# Altium PCB DIOT_SYS_extender_card.PcbDoc (part 1 of 6)
Units mm, origin at the board's own origin, x right, y up, seen from the top; angles counter-clockwise.
Board outline 280.04 x 100 mm, 6 copper layers (Top Layer, L2GND, L3, L4, L5GND, Bottom Layer), stack 1.558 mm thick; 18 components, 344 nets, 1062 pads, 179 vias.
Unrouted connection lines stored in the file: 389.
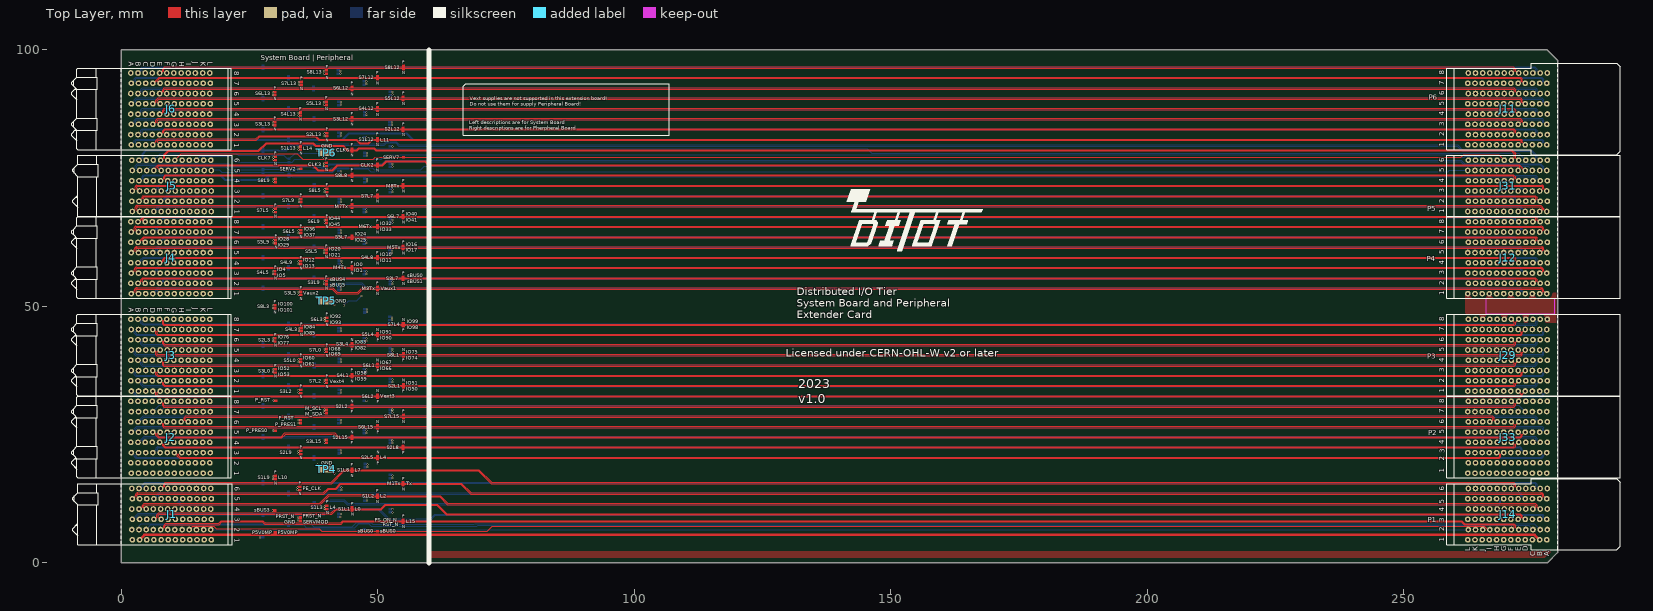
[diagram p0: Top Layer view]
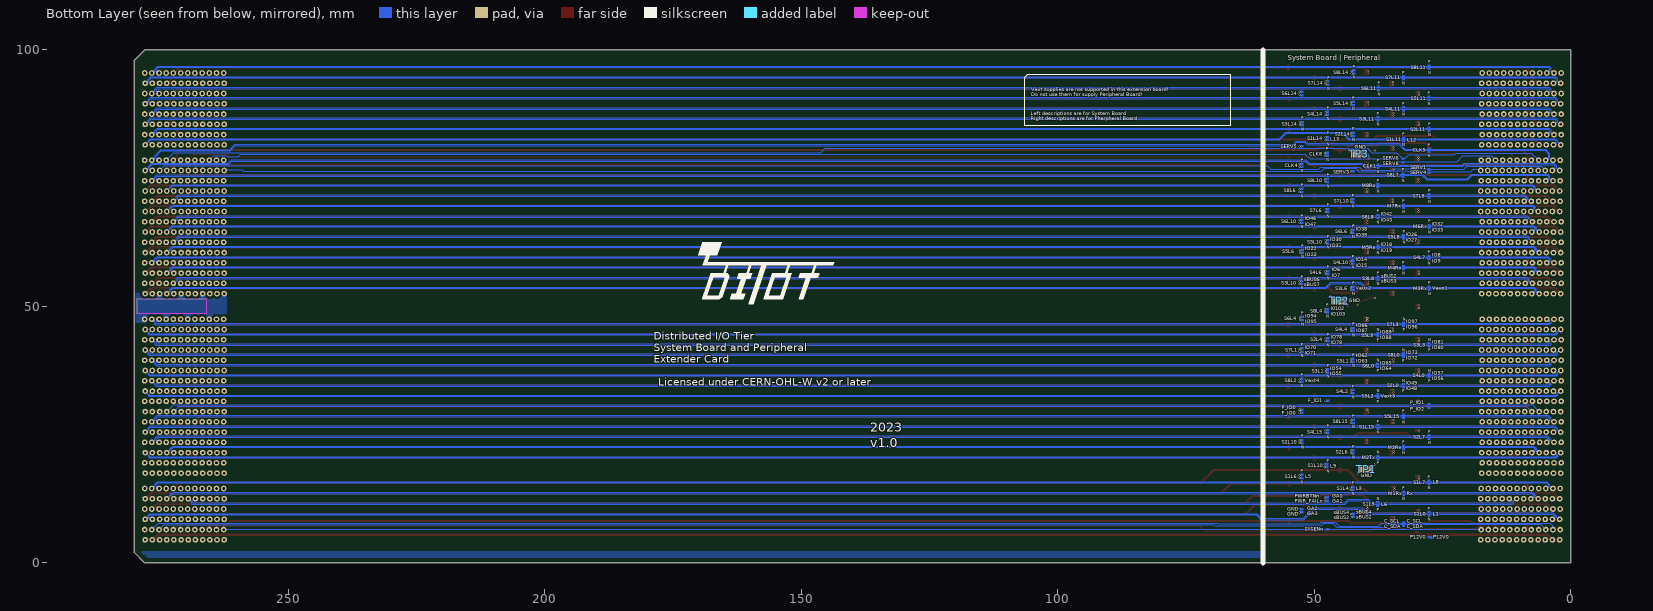
[diagram p1: Bottom Layer view, seen from below]
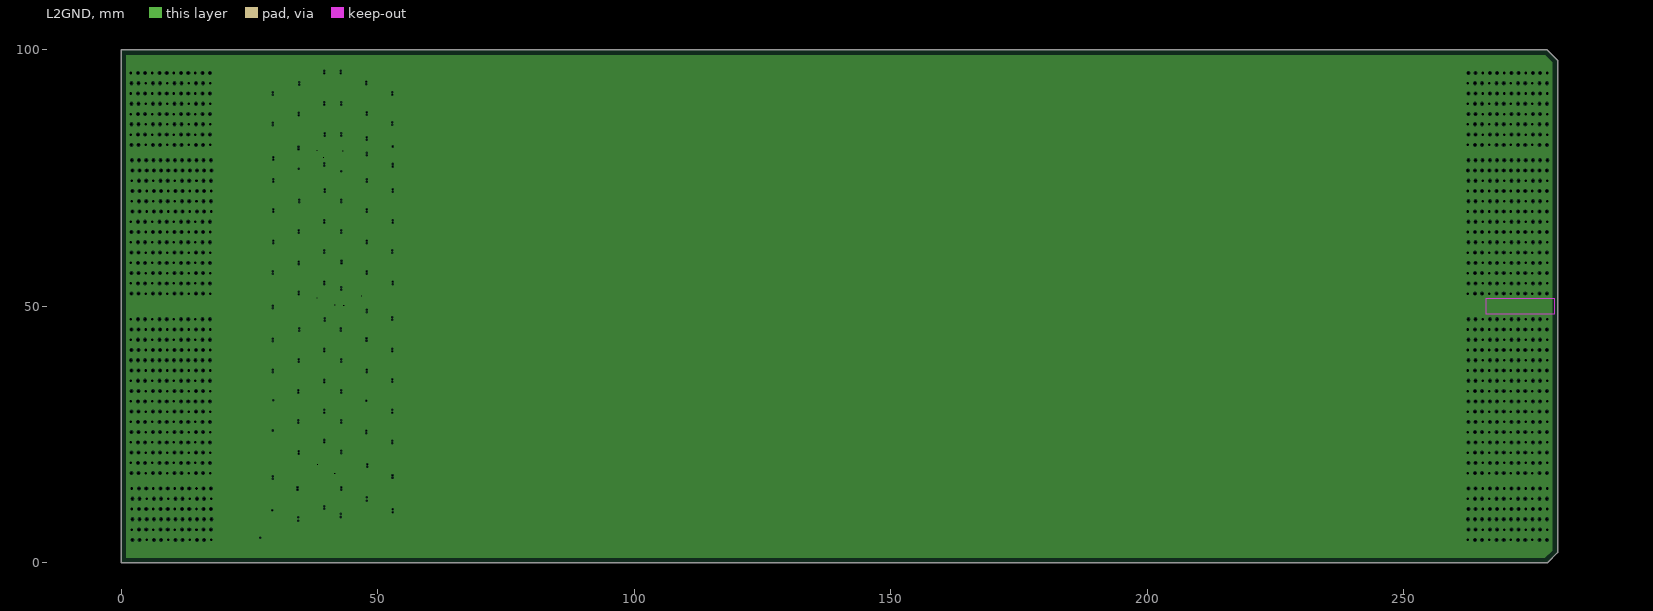
[diagram p2: L2GND, clearances drawn from the general rule]
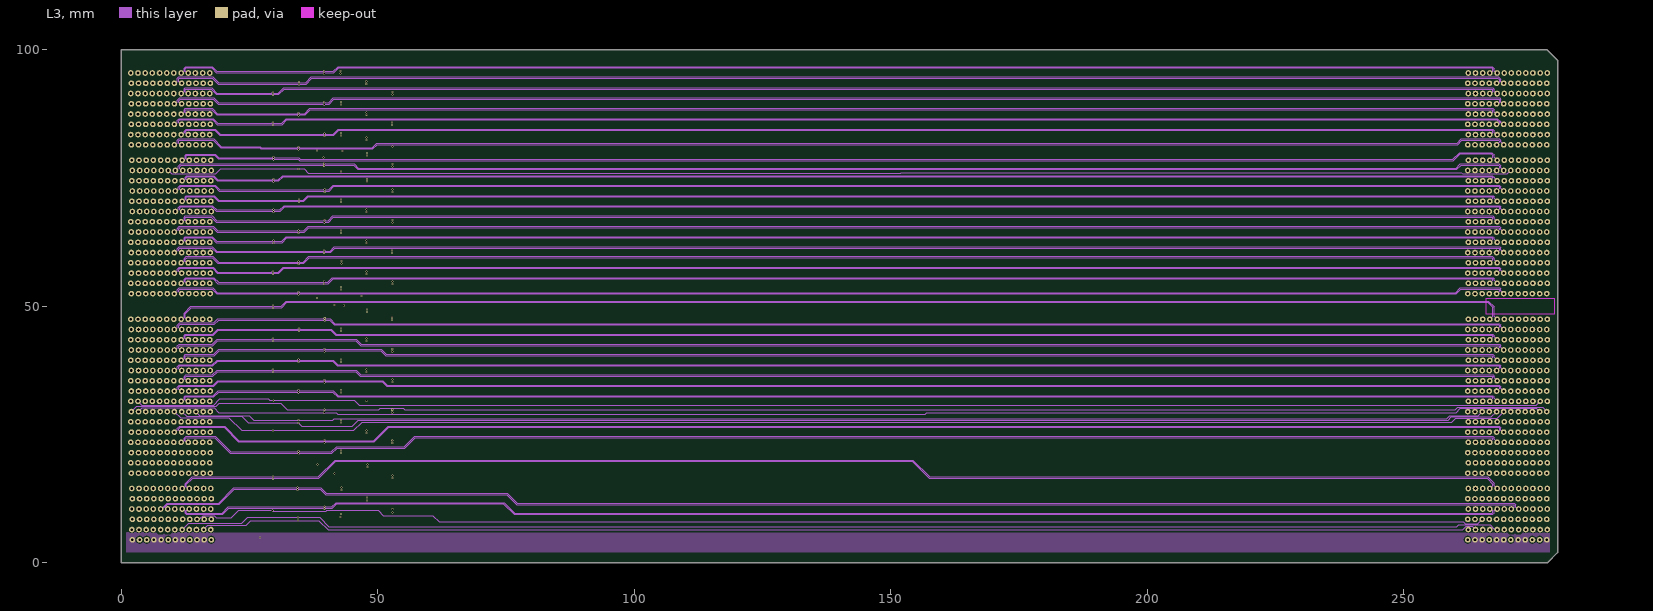
[diagram p3: L3]
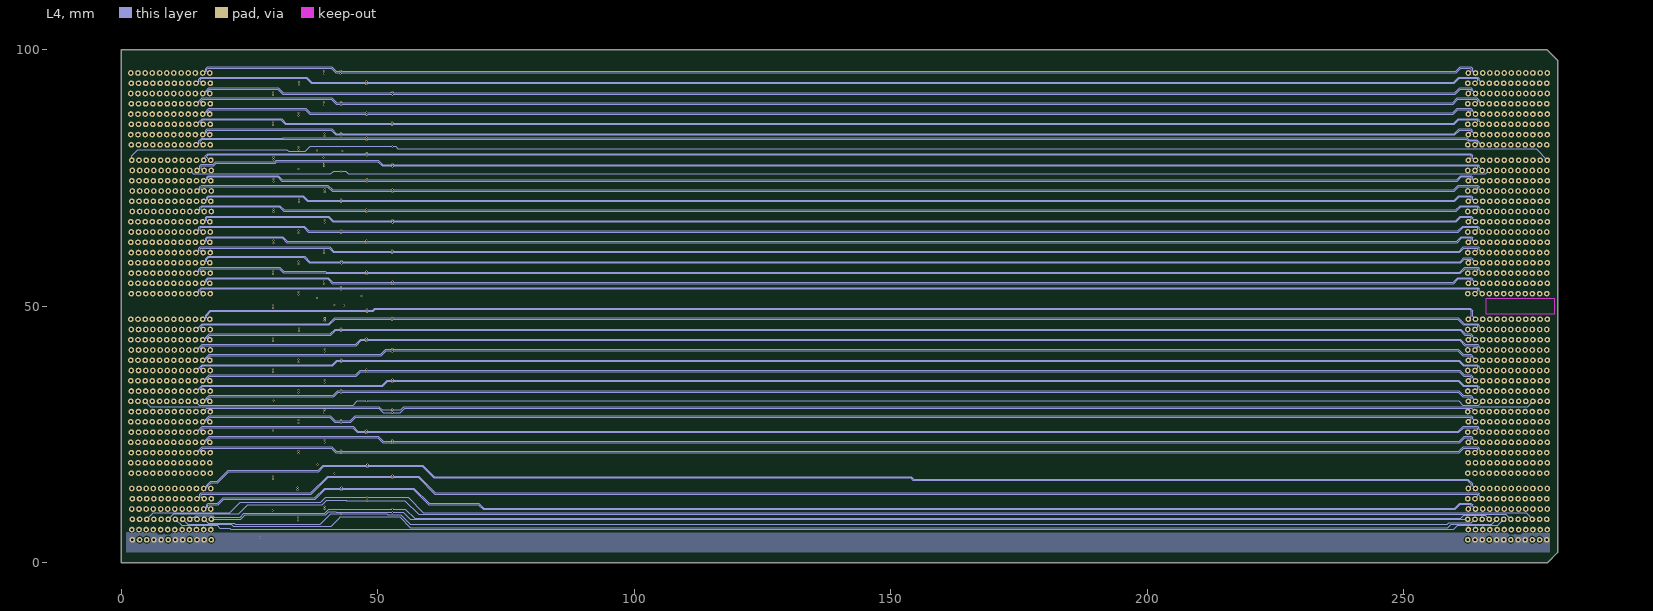
[diagram p4: L4]
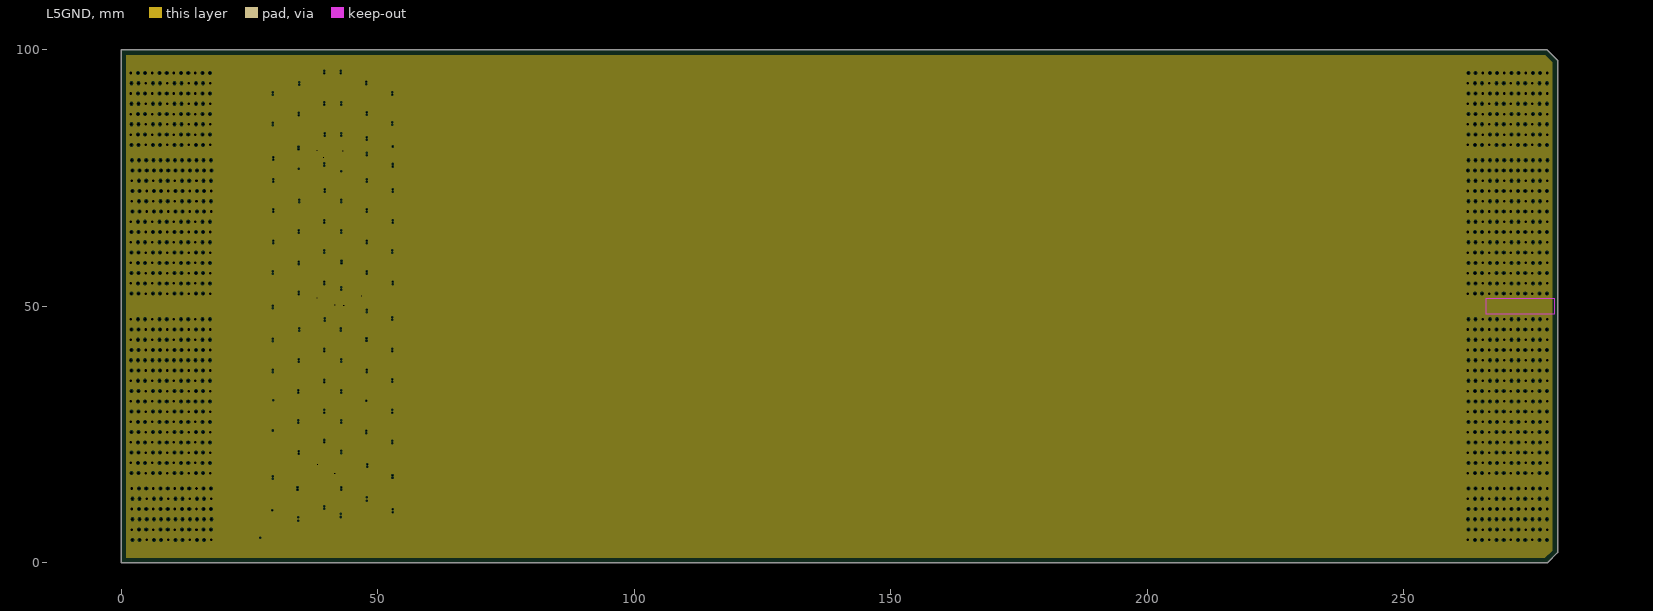
[diagram p5: L5GND, clearances drawn from the general rule]
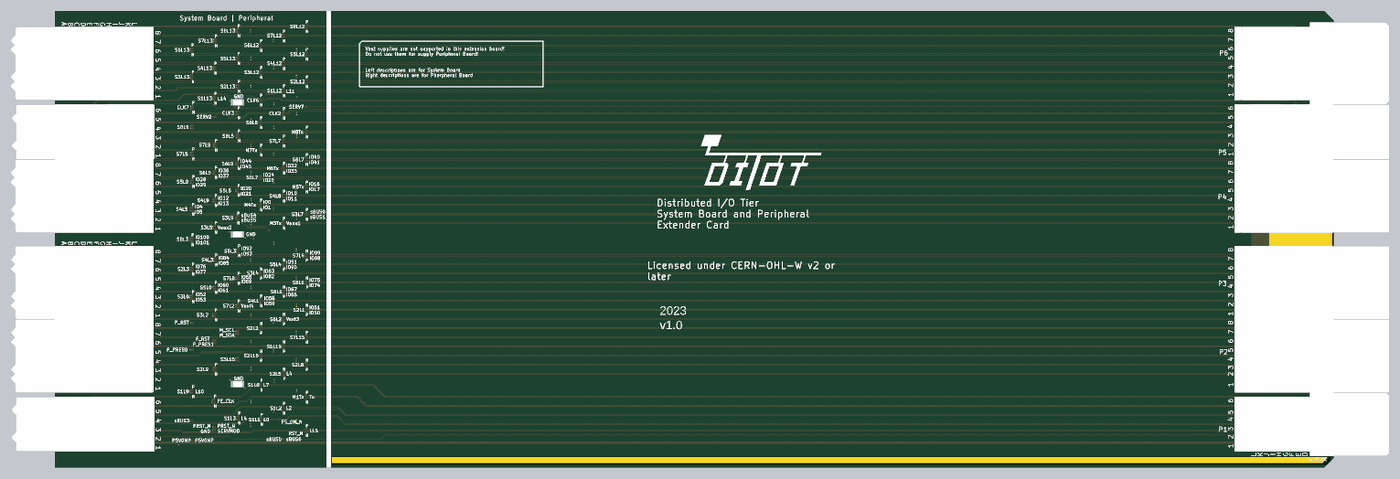
[diagram p11: 3D render of the assembled board from above, using the file's embedded part models]

## Layer stack, top to bottom
Top Solder: solder mask 0.013, Solder Resist, Dk 3.5
Top Layer: signal copper 0.035
Dielectric1: prepreg 0.11, FR-4, Dk 4.3
L2GND: plane copper 0.017, net GND
Dielectric 2: core 0.15, FR-4, Dk 4.3
L3: signal copper 0.017
Dielectric 6: core 0.9, FR-4, Dk 4.3
L4: signal copper 0.017
Dielectric 10: core 0.15, FR-4, Dk 4.3
L5GND: plane copper 0.017, net GND
Dielectric 11: prepreg 0.11, FR-4, Dk 4.3
Bottom Layer: signal copper 0.035
Bottom Solder: solder mask 0.013, Solder Resist, Dk 3.5

## Board outline
0,0 0,100 278.039,100 280.039,98 280.039,2 278.039,0

## Design rules (kind name [scope] priority, off if disabled: settings)
Clearance Clearance_poly_diff [IsRegion vs InDifferentialPairClass('All Differential Pairs')] p1: gap=0.5 ignorepadtopadclearanceinfootprint=FALSE
Clearance Clearance_Poly [InPoly and not InNet('P12V0')  and not InNet('P1V8_AUX')] p2: gap=0.254 ignorepadtopadclearanceinfootprint=FALSE
Clearance [All vs not HasFootprint('Net Tie')] p3: gap=0.08 ignorepadtopadclearanceinfootprint=FALSE except(0.2: Arc-Poly Track-Poly SMDPad-Poly THPad-Poly Via-Poly Fill-Poly Poly-Poly)
ComponentClearance ComponentClearance_pressfit [HasCompParameterValue('PressFit','Yes') vs InComponent('No Component')] p1: gap=5 collisioncheckmode=3 verticalgap=0.254 showdistances=FALSE
ComponentClearance ComponentClearance_NM [InComponentClass('NotMounted')] p2: gap=0 collisioncheckmode=3 verticalgap=0 showdistances=FALSE
ComponentClearance Overlapping [InComponent('M3') or InComponent('M4') or InComponent('LD1') or InComponent('LD5') or InComponent('LD9') or InComponent('Cage1') or InComponent('HS2') or InComponent('J5')   or InComponent('IC44') or InComponent('IC21') or InComponent('IC43') or InComponent('IC19')] p3: gap=0 collisioncheckmode=3 verticalgap=0 showdistances=TRUE
ComponentClearance ComponentClearance_Top [not InComponentClass('Overlapping') and InComponentClass('Top Side Components') vs InComponentClass('Top Side Components')] p4: gap=0 collisioncheckmode=3 verticalgap=2540 showdistances=FALSE
ComponentClearance [All] p5: gap=0.254 collisioncheckmode=3 verticalgap=0.254 showdistances=FALSE
DiffPairsRouting DiffPairsRouting_D100 [InAnyDifferentialPair] p1: maxlimit=0.16 minlimit=0.13 mostfreqgap=0.16 toplayer_maxgap=0.13 toplayer_prefgap=0.13 toplayer_minwidth=0.11 toplayer_maxwidth=0.11 toplayer_prefwidth=0.11 midlayer1_mingap=0.16 midlayer1_minwidth=0.085 midlayer1_maxwidth=0.085 midlayer1_prefwidth=0.085 midlayer4_mingap=0.16 midlayer4_minwidth=0.085 midlayer4_maxwidth=0.085 midlayer4_prefwidth=0.085 bottomlayer_maxgap=0.13 bottomlayer_prefgap=0.13 bottomlayer_minwidth=0.11 bottomlayer_maxwidth=0.11 bottomlayer_prefwidth=0.11 impedanceprofiledriven=TRUE impedanceprofileid={96ED8E2F-C5F9-42CC-A5B5-1531FE6239C8} impedanceprofilevalue=100.000000 maxuncoupledlength=25
FabricationTestPointUsage TestPointUsage [All] p1: valid=0 allowmultiple=FALSE
FabricationTestpoint Testpoint [All] p1: side=3 testpointundercomponent=TRUE minsize=1.016 maxsize=2.54 preferedsize=1.524 minholesize=0 maxholesize=1.016 preferedholesize=0.813 testpointgrid=0.025 allowsidetop=TRUE allowsidebottom=TRUE usegrid=TRUE gridtolerance=0
Height Height_Bot [OnBottom and not (InComponent('FTG2') or InComponent('FTG3')or InComponent('NT6'))] p1: minheight=0 maxheight=2 prefheight=1
Height Height_Top [OnTop] p2: minheight=0 maxheight=25 prefheight=10
HoleSize [All] p1: absolutevalues=TRUE maxlimit=5 minlimit=0.2 maxpercent=80.000 minpercent=20.000
HoleToHoleClearance [All] p1: gap=0.2 allowstackedmicrovias=TRUE
MinimumAnnularRing MinimumAnnularRing_Via [IsVia] p1: minimumring=0.1
MinimumAnnularRing [All] p2: minimumring=0.198
MinimumSolderMaskSliver [IsThruPin vs IsThruPin] p1: minsoldermaskwidth=0
PermittedLayers [All] p1: toplayerpermitted=TRUE bottomlayerpermitted=FALSE
PlaneClearance PlaneClearance_MGT [InNet('*MGT*')] p1: clearance=0.254
PlaneClearance [All] p2: clearance=0.15
PlaneConnect PlaneConnect_Vias [(IsVia or InComponent('J*')   )] p1: planeconnectstyle=Direct reliefexpansion=0.508 reliefentries=4 reliefconductorwidth=0.254 reliefairgap=0.254
PlaneConnect "PlaneConnect_0 > 0.5" [AsMM(HoleDiameter)<0.5] p2: planeconnectstyle=Relief reliefexpansion=0.3 reliefentries=4 reliefconductorwidth=0.2 reliefairgap=0.2
PlaneConnect "PlaneConnect_0.5 > 1" [(AsMM(HoleDiameter)>=0.5) and (AsMM(HoleDiameter)<1)] p3: planeconnectstyle=Relief reliefexpansion=0.3 reliefentries=4 reliefconductorwidth=0.25 reliefairgap=0.2
PlaneConnect "PlaneConnect_1 > 1.5" [(AsMM(HoleDiameter)>=1) and (AsMM(HoleDiameter)<1.5)] p4: planeconnectstyle=Relief reliefexpansion=0.3 reliefentries=4 reliefconductorwidth=0.6 reliefairgap=0.2
PlaneConnect "PlaneConnect_1.5 > 2" [(AsMM(HoleDiameter)>=1.5) and (AsMM(HoleDiameter)<4)] p5: planeconnectstyle=Direct reliefexpansion=0.3 reliefentries=4 reliefconductorwidth=0.4 reliefairgap=0.2
PlaneConnect [All] p6: planeconnectstyle=Relief reliefexpansion=0.3 reliefentries=4 reliefconductorwidth=0.6 reliefairgap=0.2
PolygonConnect PolygonConnect_PWR [InNet('P12V0') OR InNetClass('PWR')] p1: connectstyle=Direct reliefconductorwidth=0.254 reliefentries=4 polygonreliefangle="90 Angle" airgapwidth=0.254
PolygonConnect PolygonConnect_Vias [IsVia or InPadClass('Direct') or InNetClass('ESD_STRIP')] p2: connectstyle=Direct reliefconductorwidth=0.254 reliefentries=4 polygonreliefangle="90 Angle" airgapwidth=0.254
PolygonConnect "PolygonConnect_0 > 0.5" [AsMM(HoleDiameter)<0.5] p3: connectstyle=Relief reliefconductorwidth=0.2 reliefentries=4 polygonreliefangle="90 Angle" airgapwidth=0.2
PolygonConnect "PolygonConnect_0.5 > 1" [(AsMM(HoleDiameter)>=0.5) and (AsMM(HoleDiameter)<1)] p4: connectstyle=Relief reliefconductorwidth=0.25 reliefentries=4 polygonreliefangle="90 Angle" airgapwidth=0.2
PolygonConnect "PolygonConnect_1 > 1.5" [(AsMM(HoleDiameter)>=1) and (AsMM(HoleDiameter)<1.5)] p5: connectstyle=Relief reliefconductorwidth=0.6 reliefentries=4 polygonreliefangle="90 Angle" airgapwidth=0.2
PolygonConnect "PolygonConnect_1.5 > 2" [(AsMM(HoleDiameter)>=1.5) and (AsMM(HoleDiameter)<2)] p6: connectstyle=Relief reliefconductorwidth=0.6 reliefentries=4 polygonreliefangle="90 Angle" airgapwidth=0.2
PolygonConnect [All] p7: connectstyle=Relief reliefconductorwidth=0.5 reliefentries=4 polygonreliefangle="90 Angle" airgapwidth=0.2
RoomDefinition DIOT_SYS_extender_card [InComponentClass('DIOT_SYS_extender_card')] p1: confinementstyle=ConfineIn formatcopy=TRUE lockcomponents=FALSE outline 281.254,275.063 582.403,275.063 582.403,281.571 281.254,281.571
RoutingLayers RoutingLayers_MGT [InNetClass('FMC_MGT') or InNetClass('SLOT1_MGT') or InNetClass('SLOT2_MGT')  or InNetClass('SLOT3_MGT')  or InNetClass('SLOT4_MGT') or InNetClass('SLOT5_MGT')  or InNetClass('SLOT6_MGT')    or InNetClass('SLOT7_MGT')   or InNetClass('SLOT8_MGT')] p1: top layer_v5=TRUE mid layer 1_v5=TRUE mid layer 4_v5=TRUE bottom layer_v5=TRUE
RoutingVias [All] p1: holewidth=0.2 width=0.5 viastyle="Through Hole" minholewidth=0.2 minwidth=0.4 maxholewidth=1 maxwidth=2
ShortCircuit ShortCircuit_NT [InComponent('J34') or  InComponent('J31') or InComponent('J30') or InComponent('J29') or InComponent('J33') or InComponent('J26') vs InComponent('NT*')] p1: allowed=TRUE
ShortCircuit [All] p2: allowed=FALSE
SilkToSilkClearance [All] p1: silktosilkclearance=0.01
SilkToSolderMaskClearance [IsPad and not InPadClass ('Overlay_exceptions')] p1: minsilkscreentomaskgap=0.1 clearancetoexposedcopper=TRUE
SolderMaskExpansion SolderMaskExpansion_via [IsVia] p1: expansion=0.102 istentingtop=TRUE
SolderMaskExpansion [All] p2: expansion=0.015 istentingtop=FALSE
UnRoutedNet [Not InNet('CHASSIS')] p1:
ViasUnderSMD ViasUnderSMD_1 [HasFootprint('Net Tie') OR InComponent('IC1') OR InComponent('IC2') OR InComponent('IC3') OR InComponent('IC4') OR InComponent('IC22') OR InComponent('IC23') OR InComponent('IC29') OR InComponent('IC30') OR InComponent('IC31') OR InComponent('IC32') OR InComponent('IC41') OR InComponent('IC27') OR InComponent('IC37')  OR InComponent('IC38')] p1: allowed=TRUE
ViasUnderSMD [not InComponentClass('Overlapping')] p2: allowed=FALSE
Width [All] p1: maxlimit=3 minlimit=0.085 preferedwidth=0.254
15 further rules are at their usual default settings.

## Classes and differential pairs
net class PE_CLK: 1_PE_CLK_N 1_PE_CLK_P 2_PE_CLK_N 2_PE_CLK_P 3_PE_CLK_N 3_PE_CLK_P 4_PE_CLK_N 4_PE_CLK_P 5_PE_CLK_N 5_PE_CLK_P 6_PE_CLK_N 6_PE_CLK_P 7_PE_CLK_N 7_PE_CLK_P 8_PE_CLK_N 8_PE_CLK_P
pad class Direct: J11-A1 J11-A2 J11-A3 J11-A4 J11-A5 J11-A6 J11-A7 J11-A8 J11-B1 J11-B2 J11-B3 J11-B4 J11-B5 J11-B6 J11-B7 J11-B8 J11-C1 J11-C2 J11-C3 J11-C4 J11-C5 J11-C6 J11-C7 J11-C8 J11-D1 J11-D2 J11-D3 J11-D4 J11-D5 J11-D6 J11-D7 J11-D8 J11-E1 J11-E2 J11-E3 J11-E4 J11-E5 J11-E6 J11-E7 J11-E8 J11-F1 J11-F2 J11-F3 J11-F4 J11-F5 J11-F6 J11-F7 J11-F8 J11-G1 J11-G2 J11-G3 J11-G4 J11-G5 J11-G6 J11-G7 J11-G8 J11-H1 J11-H2 J11-H3 J11-H4 J11-H5 J11-H6 J11-H7 J11-H8 J11-I1 J11-I2 J11-I3 J11-I4 J11-I5 J11-I6 J11-I7 J11-I8 J11-J1 J11-J2 J11-J3 J11-J4 J11-J5 J11-J6 J11-J7 J11-J8 J11-K1 J11-K2 J11-K3 J11-K4 J11-K5 J11-K6 J11-K7 J11-K8 J11-L1 J11-L2 J11-L3 J11-L4 J11-L5 J11-L6 J11-L7 J11-L8 J12-A1 J12-A2 J12-A3 J12-A4 J12-A5 J12-A6 J12-A7 J12-A8 J12-B1 J12-B2 J12-B3 J12-B4 J12-B5 J12-B6 J12-B7 J12-B8 J12-C1 J12-C2 J12-C3 J12-C4 J12-C5 J12-C6 J12-C7 J12-C8 J12-D1 J12-D2 J12-D3 J12-D4 J12-D5 J12-D6 J12-D7 J12-D8 J12-E1 J12-E2 J12-E3 J12-E4 J12-E5 J12-E6 J12-E7 J12-E8 J12-F1 J12-F2 J12-F3 J12-F4 J12-F5 J12-F6 J12-F7 J12-F8 J12-G1 J12-G2 J12-G3 J12-G4 J12-G5 J12-G6 J12-G7 J12-G8 J12-H1 J12-H2 J12-H3 J12-H4 J12-H5 J12-H6 J12-H7 J12-H8 J12-I1 J12-I2 J12-I3 J12-I4 J12-I5 J12-I6 J12-I7 J12-I8 J12-J1 J12-J2 J12-J3 J12-J4 J12-J5 J12-J6 J12-J7 J12-J8 J12-K1 J12-K2 J12-K3 J12-K4 J12-K5 J12-K6 J12-K7 J12-K8 J12-L1 J12-L2 J12-L3 J12-L4 J12-L5 J12-L6 J12-L7 J12-L8 J14-A1 J14-A2 J14-A3 J14-A4 J14-A5 J14-A6 J14-B1 J14-B2 J14-B3 J14-B4 J14-B5 J14-B6 J14-C1 J14-C2 J14-C3 J14-C4 J14-C5 J14-C6 J14-D1 J14-D2 J14-D3 J14-D4 J14-D5 J14-D6 J14-E1 J14-E2 J14-E3 J14-E4 J14-E5 J14-E6 J14-F1 J14-F2 J14-F3 J14-F4 J14-F5 J14-F6 J14-G1 J14-G2 J14-G3 J14-G4 J14-G5 J14-G6 J14-H1 J14-H2 J14-H3 J14-H4 J14-H5 J14-H6 J14-I1 J14-I2 J14-I3 J14-I4 J14-I5 J14-I6 J14-J1 J14-J2 J14-J3 J14-J4 J14-J5 J14-J6 J14-K1 J14-K2 J14-K3 J14-K4 J14-K5 J14-K6 J14-L1 J14-L2 J14-L3 J14-L4 J14-L5 J14-L6 J29-A1 J29-A2 J29-A3 J29-A4 J29-A5 J29-A6 J29-A7 J29-A8 J29-B1 J29-B2 J29-B3 J29-B4 J29-B5 J29-B6 J29-B7 J29-B8 J29-C1 J29-C2 J29-C3 J29-C4 J29-C5 J29-C6 J29-C7 J29-C8 J29-D1 J29-D2 J29-D3 J29-D4 J29-D5 J29-D6 J29-D7 J29-D8 J29-E1 J29-E2 J29-E3 J29-E4 J29-E5 J29-E6 J29-E7 J29-E8 J29-F1 J29-F2 J29-F3 J29-F4 J29-F5 J29-F6 J29-F7 J29-F8 J29-G1 J29-G2 J29-G3 J29-G4 J29-G5 J29-G6 J29-G7 J29-G8 J29-H1 J29-H2 J29-H3 J29-H4 J29-H5 J29-H6 J29-H7 J29-H8 J29-I1 J29-I2 J29-I3 J29-I4 J29-I5 J29-I6 J29-I7 J29-I8 J29-J1 J29-J2 J29-J3 J29-J4 J29-J5 J29-J6 J29-J7 J29-J8 J29-K1 J29-K2 J29-K3 J29-K4 J29-K5 J29-K6 J29-K7 J29-K8 J29-L1 J29-L2 J29-L3 J29-L4 J29-L5 J29-L6 J29-L7 J29-L8 J31-A1 J31-A2 J31-A3 J31-A4 J31-A5 J31-A6 J31-B1 J31-B2 J31-B3 J31-B4 J31-B5 J31-B6 J31-C1 J31-C2 J31-C3 J31-C4 J31-C5 J31-C6 J31-D1 J31-D2 J31-D3 J31-D4 J31-D5 J31-D6 J31-E1 J31-E2 J31-E3 J31-E4 J31-E5 J31-E6 J31-F1 J31-F2 J31-F3 J31-F4 J31-F5 J31-F6 J31-G1 J31-G2 J31-G3 J31-G4 J31-G5 J31-G6 J31-H1 J31-H2 J31-H3 J31-H4 J31-H5 J31-H6 J31-I1 J31-I2 J31-I3 J31-I4 J31-I5 J31-I6 J31-J1 J31-J2 J31-J3 J31-J4 J31-J5 J31-J6 J31-K1 J31-K2 J31-K3 J31-K4 J31-K5 J31-K6 J31-L1 J31-L2 J31-L3 J31-L4 J31-L5 J31-L6 J33-A1 J33-A2 J33-A3 J33-A4 J33-A5 J33-A6 J33-A7 J33-A8 J33-B1 J33-B2 J33-B3 J33-B4 J33-B5 J33-B6 J33-B7 J33-B8 J33-C1 J33-C2 J33-C3 J33-C4 J33-C5 J33-C6 J33-C7 J33-C8 J33-D1 J33-D2 J33-D3 J33-D4 J33-D5 J33-D6 J33-D7 J33-D8 J33-E1 J33-E2 J33-E3 J33-E4 J33-E5 J33-E6 J33-E7 J33-E8 J33-F1 J33-F2 J33-F3 J33-F4 J33-F5 J33-F6 J33-F7 J33-F8 J33-G1 J33-G2 J33-G3 J33-G4 J33-G5 J33-G6 J33-G7 J33-G8 J33-H1 J33-H2 J33-H3 J33-H4 J33-H5 J33-H6 J33-H7 J33-H8 J33-I1 J33-I2 J33-I3 J33-I4 J33-I5 J33-I6 J33-I7 J33-I8 J33-J1 J33-J2 J33-J3 J33-J4 J33-J5 J33-J6 J33-J7 J33-J8 J33-K1 J33-K2 J33-K3 J33-K4 J33-K5 J33-K6 J33-K7 J33-K8 J33-L1 J33-L2 J33-L3 J33-L4 J33-L5 J33-L6 J33-L7 J33-L8
differential pair PE_CLK: +PE_CLK_P -PE_CLK_N
differential pair LVDS15: +LVDS15_P -LVDS15_N
differential pair MGT8_Tx: +MGT8_Tx_P -MGT8_Tx_N
differential pair MGT7_Tx: +MGT7_Tx_P -MGT7_Tx_N
differential pair MGT6_Tx: +MGT6_Tx_P -MGT6_Tx_N
differential pair MGT5_Tx: +MGT5_Tx_P -MGT5_Tx_N
differential pair MGT4_Tx: +MGT4_Tx_P -MGT4_Tx_N
differential pair MGT3_Tx: +MGT3_Tx_P -MGT3_Tx_N
differential pair MGT2_Tx: +MGT2_Tx_P -MGT2_Tx_N
differential pair MGT2_Rx: +MGT2_Rx_P -MGT2_Rx_N
differential pair MGT1_Tx: +MGT1_Tx_P -MGT1_Tx_N
differential pair MGT1_Rx: +MGT1_Rx_P -MGT1_Rx_N
differential pair 8_DIFF_15: +8_DIFF_15_P -8_DIFF_15_N
differential pair 7_DIFF_15: +7_DIFF_15_P -7_DIFF_15_N
differential pair 6_DIFF_15: +6_DIFF_15_P -6_DIFF_15_N
differential pair 5_DIFF_15: +5_DIFF_15_P -5_DIFF_15_N
differential pair 4_DIFF_15: +4_DIFF_15_P -4_DIFF_15_N
differential pair 3_DIFF_15: +3_DIFF_15_P -3_DIFF_15_N
differential pair 2_DIFF_15: +2_DIFF_15_P -2_DIFF_15_N
differential pair 1_DIFF_15: +1_DIFF_15_P -1_DIFF_15_N
differential pair SLOT3.LVDS_14: +SLOT3.LVDS_14_P -SLOT3.LVDS_14_N
differential pair SLOT3.LVDS_13: +SLOT3.LVDS_13_P -SLOT3.LVDS_13_N
differential pair SLOT3.LVDS_12: +SLOT3.LVDS_12_P -SLOT3.LVDS_12_N
differential pair SLOT3.LVDS_11: +SLOT3.LVDS_11_P -SLOT3.LVDS_11_N
differential pair SLOT1.LVDS_14: +SLOT1.LVDS_14_P -SLOT1.LVDS_14_N
differential pair SLOT1.LVDS_13: +SLOT1.LVDS_13_P -SLOT1.LVDS_13_N
differential pair SLOT1.LVDS_12: +SLOT1.LVDS_12_P -SLOT1.LVDS_12_N
differential pair SLOT1.LVDS_11: +SLOT1.LVDS_11_P -SLOT1.LVDS_11_N
differential pair 1_PE_CLK: +1_PE_CLK_P -1_PE_CLK_N
differential pair SLOT8.LVDS_14: +SLOT8.LVDS_14_P -SLOT8.LVDS_14_N
differential pair SLOT8.LVDS_13: +SLOT8.LVDS_13_P -SLOT8.LVDS_13_N
differential pair SLOT8.LVDS_12: +SLOT8.LVDS_12_P -SLOT8.LVDS_12_N
differential pair SLOT8.LVDS_11: +SLOT8.LVDS_11_P -SLOT8.LVDS_11_N
differential pair SLOT8.LVDS_10: +SLOT8.LVDS_10_P -SLOT8.LVDS_10_N
differential pair SLOT8.LVDS_9: +SLOT8.LVDS_9_P -SLOT8.LVDS_9_N
differential pair SLOT8.LVDS_8: +SLOT8.LVDS_8_P -SLOT8.LVDS_8_N
differential pair SLOT8.LVDS_7: +SLOT8.LVDS_7_P -SLOT8.LVDS_7_N
differential pair SLOT8.LVDS_6: +SLOT8.LVDS_6_P -SLOT8.LVDS_6_N
differential pair SLOT8.LVDS_5: +SLOT8.LVDS_5_P -SLOT8.LVDS_5_N
differential pair SLOT8.LVDS_4: +SLOT8.LVDS_4_P -SLOT8.LVDS_4_N
differential pair SLOT8.LVDS_3: +SLOT8.LVDS_3_P -SLOT8.LVDS_3_N
differential pair SLOT8.LVDS_2: +SLOT8.LVDS_2_P -SLOT8.LVDS_2_N
differential pair SLOT8.LVDS_1: +SLOT8.LVDS_1_P -SLOT8.LVDS_1_N
differential pair SLOT8.LVDS_0: +SLOT8.LVDS_0_P -SLOT8.LVDS_0_N
differential pair SLOT7.LVDS_10: +SLOT7.LVDS_10_P -SLOT7.LVDS_10_N
differential pair SLOT7.LVDS_9: +SLOT7.LVDS_9_P -SLOT7.LVDS_9_N
differential pair SLOT7.LVDS_8: +SLOT7.LVDS_8_P -SLOT7.LVDS_8_N
differential pair SLOT7.LVDS_7: +SLOT7.LVDS_7_P -SLOT7.LVDS_7_N
differential pair SLOT7.LVDS_6: +SLOT7.LVDS_6_P -SLOT7.LVDS_6_N
differential pair SLOT7.LVDS_5: +SLOT7.LVDS_5_P -SLOT7.LVDS_5_N
differential pair SLOT7.LVDS_4: +SLOT7.LVDS_4_P -SLOT7.LVDS_4_N
differential pair SLOT7.LVDS_3: +SLOT7.LVDS_3_P -SLOT7.LVDS_3_N
differential pair SLOT7.LVDS_2: +SLOT7.LVDS_2_P -SLOT7.LVDS_2_N
differential pair SLOT7.LVDS_1: +SLOT7.LVDS_1_P -SLOT7.LVDS_1_N
differential pair SLOT6.LVDS_0: +SLOT6.LVDS_0_P -SLOT6.LVDS_0_N
differential pair SLOT2.LVDS_13: +SLOT2.LVDS_13_P -SLOT2.LVDS_13_N
differential pair SLOT2.LVDS_11: +SLOT2.LVDS_11_P -SLOT2.LVDS_11_N
differential pair MGT8_RxC: +MGT8_RxC_P -MGT8_RxC_N
differential pair 8_PE_CLK: +8_PE_CLK_P -8_PE_CLK_N
differential pair 4_PE_CLK: +4_PE_CLK_P -4_PE_CLK_N
differential pair SLOT1.LVDS_10: +SLOT1.LVDS_10_P -SLOT1.LVDS_10_N
differential pair SLOT1.LVDS_9: +SLOT1.LVDS_9_P -SLOT1.LVDS_9_N
differential pair SLOT1.LVDS_6: +SLOT1.LVDS_6_P -SLOT1.LVDS_6_N
differential pair SLOT1.LVDS_5: +SLOT1.LVDS_5_P -SLOT1.LVDS_5_N
differential pair SLOT1.LVDS_4: +SLOT1.LVDS_4_P -SLOT1.LVDS_4_N
differential pair SLOT1.LVDS_3: +SLOT1.LVDS_3_P -SLOT1.LVDS_3_N
differential pair SLOT1.LVDS_2: +SLOT1.LVDS_2_P -SLOT1.LVDS_2_N
differential pair SLOT1.LVDS_1: +SLOT1.LVDS_1_P -SLOT1.LVDS_1_N
differential pair MGT6_RxC: +MGT7_RxC_P -MGT7_RxC_N
differential pair MGT5_RxC: +MGT6_RxC_P -MGT6_RxC_N
differential pair MGT4_RxC: +MGT5_RxC_P -MGT5_RxC_N
differential pair MGT3_RxC: +MGT4_RxC_P -MGT4_RxC_N
differential pair MGT2_RxC: +MGT3_RxC_P -MGT3_RxC_N
differential pair SLOT7.LVDS_10: +SLOT6.LVDS_10_P -SLOT6.LVDS_10_N
differential pair SLOT7.LVDS_9: +SLOT6.LVDS_9_P -SLOT6.LVDS_9_N
differential pair SLOT7.LVDS_8: +SLOT6.LVDS_8_P -SLOT6.LVDS_8_N
differential pair SLOT7.LVDS_7: +SLOT6.LVDS_7_P -SLOT6.LVDS_7_N
differential pair SLOT7.LVDS_6: +SLOT6.LVDS_6_P -SLOT6.LVDS_6_N
differential pair SLOT7.LVDS_5: +SLOT6.LVDS_5_P -SLOT6.LVDS_5_N
differential pair SLOT7.LVDS_4: +SLOT6.LVDS_4_P -SLOT6.LVDS_4_N
differential pair SLOT7.LVDS_3: +SLOT6.LVDS_3_P -SLOT6.LVDS_3_N
differential pair SLOT7.LVDS_2: +SLOT6.LVDS_2_P -SLOT6.LVDS_2_N
differential pair SLOT7.LVDS_1: +SLOT6.LVDS_1_P -SLOT6.LVDS_1_N
differential pair SLOT7.LVDS_0: +SLOT7.LVDS_0_P -SLOT7.LVDS_0_N
differential pair SLOT6.LVDS_14: +SLOT7.LVDS_14_P -SLOT7.LVDS_14_N
differential pair SLOT6.LVDS_13: +SLOT7.LVDS_13_P -SLOT7.LVDS_13_N
differential pair SLOT6.LVDS_12: +SLOT7.LVDS_12_P -SLOT7.LVDS_12_N
differential pair SLOT6.LVDS_11: +SLOT7.LVDS_11_P -SLOT7.LVDS_11_N
differential pair SLOT6.LVDS_10: +SLOT5.LVDS_10_P -SLOT5.LVDS_10_N
differential pair SLOT6.LVDS_9: +SLOT5.LVDS_9_P -SLOT5.LVDS_9_N
differential pair SLOT6.LVDS_8: +SLOT5.LVDS_8_P -SLOT5.LVDS_8_N
differential pair SLOT6.LVDS_7: +SLOT5.LVDS_7_P -SLOT5.LVDS_7_N
differential pair SLOT6.LVDS_6: +SLOT5.LVDS_6_P -SLOT5.LVDS_6_N
differential pair SLOT6.LVDS_5: +SLOT5.LVDS_5_P -SLOT5.LVDS_5_N
differential pair SLOT6.LVDS_4: +SLOT5.LVDS_4_P -SLOT5.LVDS_4_N
differential pair SLOT6.LVDS_3: +SLOT5.LVDS_3_P -SLOT5.LVDS_3_N
differential pair SLOT6.LVDS_2: +SLOT5.LVDS_2_P -SLOT5.LVDS_2_N
differential pair SLOT6.LVDS_1: +SLOT5.LVDS_1_P -SLOT5.LVDS_1_N
differential pair SLOT6.LVDS_0: +SLOT5.LVDS_0_P -SLOT5.LVDS_0_N
differential pair SLOT5.LVDS_14: +SLOT6.LVDS_14_P -SLOT6.LVDS_14_N
differential pair SLOT5.LVDS_13: +SLOT6.LVDS_13_P -SLOT6.LVDS_13_N
differential pair SLOT5.LVDS_12: +SLOT6.LVDS_12_P -SLOT6.LVDS_12_N
differential pair SLOT5.LVDS_11: +SLOT6.LVDS_11_P -SLOT6.LVDS_11_N
differential pair SLOT5.LVDS_10: +SLOT4.LVDS_10_P -SLOT4.LVDS_10_N
differential pair SLOT5.LVDS_9: +SLOT4.LVDS_9_P -SLOT4.LVDS_9_N
differential pair SLOT5.LVDS_8: +SLOT4.LVDS_8_P -SLOT4.LVDS_8_N
differential pair SLOT5.LVDS_7: +SLOT4.LVDS_7_P -SLOT4.LVDS_7_N
differential pair SLOT5.LVDS_6: +SLOT4.LVDS_6_P -SLOT4.LVDS_6_N
differential pair SLOT5.LVDS_5: +SLOT4.LVDS_5_P -SLOT4.LVDS_5_N
differential pair SLOT5.LVDS_4: +SLOT4.LVDS_4_P -SLOT4.LVDS_4_N
differential pair SLOT5.LVDS_3: +SLOT4.LVDS_3_P -SLOT4.LVDS_3_N
differential pair SLOT5.LVDS_2: +SLOT4.LVDS_2_P -SLOT4.LVDS_2_N
differential pair SLOT5.LVDS_1: +SLOT4.LVDS_1_P -SLOT4.LVDS_1_N
differential pair SLOT5.LVDS_0: +SLOT4.LVDS_0_P -SLOT4.LVDS_0_N
differential pair SLOT4.LVDS_14: +SLOT5.LVDS_14_P -SLOT5.LVDS_14_N
differential pair SLOT4.LVDS_13: +SLOT5.LVDS_13_P -SLOT5.LVDS_13_N
differential pair SLOT4.LVDS_12: +SLOT5.LVDS_12_P -SLOT5.LVDS_12_N
differential pair SLOT4.LVDS_11: +SLOT5.LVDS_11_P -SLOT5.LVDS_11_N
differential pair SLOT4.LVDS_10: +SLOT3.LVDS_10_P -SLOT3.LVDS_10_N
differential pair SLOT4.LVDS_9: +SLOT3.LVDS_9_P -SLOT3.LVDS_9_N
differential pair SLOT4.LVDS_8: +SLOT3.LVDS_8_P -SLOT3.LVDS_8_N
differential pair SLOT4.LVDS_7: +SLOT3.LVDS_7_P -SLOT3.LVDS_7_N
differential pair SLOT4.LVDS_6: +SLOT3.LVDS_6_P -SLOT3.LVDS_6_N
differential pair SLOT4.LVDS_5: +SLOT3.LVDS_5_P -SLOT3.LVDS_5_N
differential pair SLOT4.LVDS_4: +SLOT3.LVDS_4_P -SLOT3.LVDS_4_N
differential pair SLOT4.LVDS_3: +SLOT3.LVDS_3_P -SLOT3.LVDS_3_N
differential pair SLOT4.LVDS_2: +SLOT3.LVDS_2_P -SLOT3.LVDS_2_N
differential pair SLOT4.LVDS_1: +SLOT3.LVDS_1_P -SLOT3.LVDS_1_N
differential pair SLOT4.LVDS_0: +SLOT3.LVDS_0_P -SLOT3.LVDS_0_N
differential pair SLOT3.LVDS_14: +SLOT4.LVDS_14_P -SLOT4.LVDS_14_N
differential pair SLOT3.LVDS_13: +SLOT4.LVDS_13_P -SLOT4.LVDS_13_N
differential pair SLOT3.LVDS_12: +SLOT4.LVDS_12_P -SLOT4.LVDS_12_N
differential pair SLOT3.LVDS_11: +SLOT4.LVDS_11_P -SLOT4.LVDS_11_N
differential pair SLOT3.LVDS_10: +SLOT2.LVDS_10_P -SLOT2.LVDS_10_N
differential pair SLOT3.LVDS_9: +SLOT2.LVDS_9_P -SLOT2.LVDS_9_N
differential pair SLOT3.LVDS_8: +SLOT2.LVDS_8_P -SLOT2.LVDS_8_N
differential pair SLOT3.LVDS_7: +SLOT2.LVDS_7_P -SLOT2.LVDS_7_N
differential pair SLOT3.LVDS_6: +SLOT2.LVDS_6_P -SLOT2.LVDS_6_N
differential pair SLOT3.LVDS_5: +SLOT2.LVDS_5_P -SLOT2.LVDS_5_N
differential pair SLOT3.LVDS_4: +SLOT2.LVDS_4_P -SLOT2.LVDS_4_N
differential pair SLOT3.LVDS_3: +SLOT2.LVDS_3_P -SLOT2.LVDS_3_N
differential pair SLOT3.LVDS_2: +SLOT2.LVDS_2_P -SLOT2.LVDS_2_N
differential pair SLOT3.LVDS_1: +SLOT2.LVDS_1_P -SLOT2.LVDS_1_N
differential pair SLOT3.LVDS_0: +SLOT2.LVDS_0_P -SLOT2.LVDS_0_N
differential pair SLOT2.LVDS_14: +SLOT2.LVDS_14_P -SLOT2.LVDS_14_N
differential pair SLOT2.LVDS_12: +SLOT2.LVDS_12_P -SLOT2.LVDS_12_N
differential pair SLOT2.LVDS_8: +SLOT1.LVDS_8_P -SLOT1.LVDS_8_N
differential pair SLOT2.LVDS_7: +SLOT1.LVDS_7_P -SLOT1.LVDS_7_N
differential pair SLOT2.LVDS_0: +SLOT1.LVDS_0_P -SLOT1.LVDS_0_N
differential pair 7_PE_CLK: +7_PE_CLK_P -7_PE_CLK_N
differential pair 6_PE_CLK: +6_PE_CLK_P -6_PE_CLK_N
differential pair 5_PE_CLK: +5_PE_CLK_P -5_PE_CLK_N
differential pair 3_PE_CLK: +3_PE_CLK_P -3_PE_CLK_N
differential pair 2_PE_CLK: +2_PE_CLK_P -2_PE_CLK_N

## Components (designator, comment, footprint, x,y, rotation, side; value= is the part's Value field where it differs from the comment)
J1 "AirMax VS" AMPHENOL_10114633-101LF 9.85,9.5 r270 top locked
J2 "AirMax VS" AMPHENOL_10060905-101LF 9.65,24.5 r270 top locked
J3 "AirMax VS" AMPHENOL_10060905-101LF 9.65,40.5 r270 top locked
J4 "AirMax VS" AMPHENOL_10060905-101LF 9.65,59.5 r270 top locked
J5 "AirMax VS" AMPHENOL_10114633-101LF 9.85,73.5 r270 top locked
J6 "AirMax VS" AMPHENOL_10060905-101LF 9.65,88.5 r270 top locked
J11 "P6" AMPHENOL_10052838-101LF 270.289,88.5 r90 top locked
J12 "P4" AMPHENOL_10052837-101LF 270.289,59.5 r90 top locked
J14 "P1" AMPHENOL_10052825-101LF 270.289,9.5 r90 top locked
J29 "P3" AMPHENOL_10052837-101LF 270.289,40.5 r90 top locked
J31 "P5" AMPHENOL_10052824-101LF 270.289,73.5 r90 top locked
J33 "P2" AMPHENOL_10052837-101LF 270.289,24.5 r90 top locked
TP1 "" TYCO_RCT-0C 39.919,18.275 r180 bottom
TP2 "" TYCO_RCT-0C 45.141,51.1 r180 bottom
TP3 "" TYCO_RCT-0C 41.353,79.769 r180 bottom
TP4 "" TYCO_RCT-0C 39.986,18.275 r0 top
TP5 "" TYCO_RCT-0C 39.986,51.1 r0 top
TP6 "" TYCO_RCT-0C 39.986,80 r0 top

## Footprints (in the part's own frame and the unit in brackets; to place one, negate y for a bottom-side part, rotate by r counter-clockwise, add the part's x,y. Pads: shape width x height; smd on the part's side, far side on the other; paste and mask are expansions set on the pad)
AMPHENOL_10052824-101LF [mm] "72 Contacts, 2mm Pitch, 6 Columns, 4 Pairs per Column, 2 Walls, Right Angle Header"
  round 1.1 hole 0.5: A1(-5,-7.65) A2(-3,-7.75) A3(-1,-7.65) A4(1,-7.75) A5(3,-7.65) A6(5,-7.75) B1(-5,-6.25) B2(-3,-6.35) B3(-1,-6.25) B4(1,-6.35) B5(3,-6.25) B6(5,-6.35) C1(-5,-4.85) C2(-3,-4.95) C3(-1,-4.85) C4(1,-4.95) C5(3,-4.85) C6(5,-4.95) D1(-5,-3.45) D2(-3,-3.55) D3(-1,-3.45) D4(1,-3.55) D5(3,-3.45) D6(5,-3.55) E1(-5,-2.05) E2(-3,-2.15) E3(-1,-2.05) E4(1,-2.15) E5(3,-2.05) E6(5,-2.15) F1(-5,-0.65) F2(-3,-0.75) F3(-1,-0.65) F4(1,-0.75) F5(3,-0.65) F6(5,-0.75) G1(-5,0.75) G2(-3,0.65) G3(-1,0.75) G4(1,0.65) G5(3,0.75) G6(5,0.65) H1(-5,2.15) H2(-3,2.05) H3(-1,2.15) H4(1,2.05) H5(3,2.15) H6(5,2.05) I1(-5,3.55) I2(-3,3.45) I3(-1,3.55) I4(1,3.45) I5(3,3.55) I6(5,3.45) J1(-5,4.95) J2(-3,4.85) J3(-1,4.95) J4(1,4.85) J5(3,4.95) J6(5,4.85) K1(-5,6.35) K2(-3,6.25) K3(-1,6.35) K4(1,6.25) K5(3,6.35) K6(5,6.25) L1(-5,7.75) L2(-3,7.65) L3(-1,7.75) L4(1,7.65) L5(3,7.75) L6(5,7.65)
  silkscreen extent -5.95,-21.95 5.95,11.85, body extent -5.95,-21.95 5.95,11.85, height 15.25
AMPHENOL_10052825-101LF [mm] "72 Contacts, 2mm Pitch, 6 Columns, 4 Pairs per Column, 4 Walls, Right Angle Header"
  round 1.1 hole 0.5: A1(-5,-7.65) A2(-3,-7.75) A3(-1,-7.65) A4(1,-7.75) A5(3,-7.65) A6(5,-7.75) B1(-5,-6.25) B2(-3,-6.35) B3(-1,-6.25) B4(1,-6.35) B5(3,-6.25) B6(5,-6.35) C1(-5,-4.85) C2(-3,-4.95) C3(-1,-4.85) C4(1,-4.95) C5(3,-4.85) C6(5,-4.95) D1(-5,-3.45) D2(-3,-3.55) D3(-1,-3.45) D4(1,-3.55) D5(3,-3.45) D6(5,-3.55) E1(-5,-2.05) E2(-3,-2.15) E3(-1,-2.05) E4(1,-2.15) E5(3,-2.05) E6(5,-2.15) F1(-5,-0.65) F2(-3,-0.75) F3(-1,-0.65) F4(1,-0.75) F5(3,-0.65) F6(5,-0.75) G1(-5,0.75) G2(-3,0.65) G3(-1,0.75) G4(1,0.65) G5(3,0.75) G6(5,0.65) H1(-5,2.15) H2(-3,2.05) H3(-1,2.15) H4(1,2.05) H5(3,2.15) H6(5,2.05) I1(-5,3.55) I2(-3,3.45) I3(-1,3.55) I4(1,3.45) I5(3,3.55) I6(5,3.45) J1(-5,4.95) J2(-3,4.85) J3(-1,4.95) J4(1,4.85) J5(3,4.95) J6(5,4.85) K1(-5,6.35) K2(-3,6.25) K3(-1,6.35) K4(1,6.25) K5(3,6.35) K6(5,6.25) L1(-5,7.75) L2(-3,7.65) L3(-1,7.75) L4(1,7.65) L5(3,7.75) L6(5,7.65)
  silkscreen extent -6.95,-21.95 6.95,11.85, body extent -6.95,-21.95 6.95,11.85, height 15.25
AMPHENOL_10052837-101LF [mm] "96 Contacts, 2mm Pitch, 8 Columns, 4 Pairs per Column, 2 Walls, Right Angle Header"
  round 1.1 hole 0.5: A1(-7,-7.65) A2(-5,-7.75) A3(-3,-7.65) A4(-1,-7.75) A5(1,-7.65) A6(3,-7.75) A7(5,-7.65) A8(7,-7.75) B1(-7,-6.25) B2(-5,-6.35) B3(-3,-6.25) B4(-1,-6.35) B5(1,-6.25) B6(3,-6.35) B7(5,-6.25) B8(7,-6.35) C1(-7,-4.85) C2(-5,-4.95) C3(-3,-4.85) C4(-1,-4.95) C5(1,-4.85) C6(3,-4.95) C7(5,-4.85) C8(7,-4.95) D1(-7,-3.45) D2(-5,-3.55) D3(-3,-3.45) D4(-1,-3.55) D5(1,-3.45) D6(3,-3.55) D7(5,-3.45) D8(7,-3.55) E1(-7,-2.05) E2(-5,-2.15) E3(-3,-2.05) E4(-1,-2.15) E5(1,-2.05) E6(3,-2.15) E7(5,-2.05) E8(7,-2.15) F1(-7,-0.65) F2(-5,-0.75) F3(-3,-0.65) F4(-1,-0.75) F5(1,-0.65) F6(3,-0.75) F7(5,-0.65) F8(7,-0.75) G1(-7,0.75) G2(-5,0.65) G3(-3,0.75) G4(-1,0.65) G5(1,0.75) G6(3,0.65) G7(5,0.75) G8(7,0.65) H1(-7,2.15) H2(-5,2.05) H3(-3,2.15) H4(-1,2.05) H5(1,2.15) H6(3,2.05) H7(5,2.15) H8(7,2.05) I1(-7,3.55) I2(-5,3.45) I3(-3,3.55) I4(-1,3.45) I5(1,3.55) I6(3,3.45) I7(5,3.55) I8(7,3.45) J1(-7,4.95) J2(-5,4.85) J3(-3,4.95) J4(-1,4.85) J5(1,4.95) J6(3,4.85) J7(5,4.95) J8(7,4.85) K1(-7,6.35) K2(-5,6.25) K3(-3,6.35) K4(-1,6.25) K5(1,6.35) K6(3,6.25) K7(5,6.35) K8(7,6.25) L1(-7,7.75) L2(-5,7.65) L3(-3,7.75) L4(-1,7.65) L5(1,7.75) L6(3,7.65) L7(5,7.75) L8(7,7.65)
  silkscreen extent -7.95,-21.95 7.95,11.85, body extent -7.95,-21.95 7.95,11.85, height 15.25
AMPHENOL_10052838-101LF [mm] "96 Contacts, 2mm Pitch, 8 Columns, 4 Pairs per Column, 4 Walls, Right Angle Header"
  round 1.1 hole 0.5: A1(-7,-7.65) A2(-5,-7.75) A3(-3,-7.65) A4(-1,-7.75) A5(1,-7.65) A6(3,-7.75) A7(5,-7.65) A8(7,-7.75) B1(-7,-6.25) B2(-5,-6.35) B3(-3,-6.25) B4(-1,-6.35) B5(1,-6.25) B6(3,-6.35) B7(5,-6.25) B8(7,-6.35) C1(-7,-4.85) C2(-5,-4.95) C3(-3,-4.85) C4(-1,-4.95) C5(1,-4.85) C6(3,-4.95) C7(5,-4.85) C8(7,-4.95) D1(-7,-3.45) D2(-5,-3.55) D3(-3,-3.45) D4(-1,-3.55) D5(1,-3.45) D6(3,-3.55) D7(5,-3.45) D8(7,-3.55) E1(-7,-2.05) E2(-5,-2.15) E3(-3,-2.05) E4(-1,-2.15) E5(1,-2.05) E6(3,-2.15) E7(5,-2.05) E8(7,-2.15) F1(-7,-0.65) F2(-5,-0.75) F3(-3,-0.65) F4(-1,-0.75) F5(1,-0.65) F6(3,-0.75) F7(5,-0.65) F8(7,-0.75) G1(-7,0.75) G2(-5,0.65) G3(-3,0.75) G4(-1,0.65) G5(1,0.75) G6(3,0.65) G7(5,0.75) G8(7,0.65) H1(-7,2.15) H2(-5,2.05) H3(-3,2.15) H4(-1,2.05) H5(1,2.15) H6(3,2.05) H7(5,2.15) H8(7,2.05) I1(-7,3.55) I2(-5,3.45) I3(-3,3.55) I4(-1,3.45) I5(1,3.55) I6(3,3.45) I7(5,3.55) I8(7,3.45) J1(-7,4.95) J2(-5,4.85) J3(-3,4.95) J4(-1,4.85) J5(1,4.95) J6(3,4.85) J7(5,4.95) J8(7,4.85) K1(-7,6.35) K2(-5,6.25) K3(-3,6.35) K4(-1,6.25) K5(1,6.35) K6(3,6.25) K7(5,6.35) K8(7,6.25) L1(-7,7.75) L2(-5,7.65) L3(-3,7.75) L4(-1,7.65) L5(1,7.75) L6(3,7.65) L7(5,7.75) L8(7,7.65)
  silkscreen extent -8.95,-21.95 8.95,11.85, body extent -8.95,-21.95 8.95,11.85, height 15.25
AMPHENOL_10060905-101LF [mm] "96 Contacts, 2mm Pitch, 8 Columns, 4 Pairs per Column, Right Angle Receptacle"
  round 1.1 hole 0.5: A1(7,-7.65) A2(5,-7.75) A3(3,-7.65) A4(1,-7.75) A5(-1,-7.65) A6(-3,-7.75) A7(-5,-7.65) A8(-7,-7.75) B1(7,-6.25) B2(5,-6.35) B3(3,-6.25) B4(1,-6.35) B5(-1,-6.25) B6(-3,-6.35) B7(-5,-6.25) B8(-7,-6.35) C1(7,-4.85) C2(5,-4.95) C3(3,-4.85) C4(1,-4.95) C5(-1,-4.85) C6(-3,-4.95) C7(-5,-4.85) C8(-7,-4.95) D1(7,-3.45) D2(5,-3.55) D3(3,-3.45) D4(1,-3.55) D5(-1,-3.45) D6(-3,-3.55) D7(-5,-3.45) D8(-7,-3.55) E1(7,-2.05) E2(5,-2.15) E3(3,-2.05) E4(1,-2.15) E5(-1,-2.05) E6(-3,-2.15) E7(-5,-2.05) E8(-7,-2.15) F1(7,-0.65) F2(5,-0.75) F3(3,-0.65) F4(1,-0.75) F5(-1,-0.65) F6(-3,-0.75) F7(-5,-0.65) F8(-7,-0.75) G1(7,0.75) G2(5,0.65) G3(3,0.75) G4(1,0.65) G5(-1,0.75) G6(-3,0.65) G7(-5,0.75) G8(-7,0.65) H1(7,2.15) H2(5,2.05) H3(3,2.15) H4(1,2.05) H5(-1,2.15) H6(-3,2.05) H7(-5,2.15) H8(-7,2.05) I1(7,3.55) I2(5,3.45) I3(3,3.55) I4(1,3.45) I5(-1,3.55) I6(-3,3.45) I7(-5,3.55) I8(-7,3.45) J1(7,4.95) J2(5,4.85) J3(3,4.95) J4(1,4.85) J5(-1,4.95) J6(-3,4.85) J7(-5,4.95) J8(-7,4.85) K1(7,6.35) K2(5,6.25) K3(3,6.35) K4(1,6.25) K5(-1,6.35) K6(-3,6.25) K7(-5,6.35) K8(-7,6.25) L1(7,7.75) L2(5,7.65) L3(3,7.75) L4(1,7.65) L5(-1,7.75) L6(-3,7.65) L7(-5,7.75) L8(-7,7.65)
  silkscreen extent -7.95,-19.25 7.95,11.85, body extent -7.95,-19.25 7.95,11.85, height 14.85
AMPHENOL_10114633-101LF [mm] "72 Contacts, 2mm Pitch, 6 Columns, 4 Pairs per Column, Right Angle Receptacle"
  round 1.1 hole 0.5: A1(5,-7.65) A2(3,-7.75) A3(1,-7.65) A4(-1,-7.75) A5(-3,-7.65) A6(-5,-7.75) B1(5,-6.25) B2(3,-6.35) B3(1,-6.25) B4(-1,-6.35) B5(-3,-6.25) B6(-5,-6.35) C1(5,-4.85) C2(3,-4.95) C3(1,-4.85) C4(-1,-4.95) C5(-3,-4.85) C6(-5,-4.95) D1(5,-3.45) D2(3,-3.55) D3(1,-3.45) D4(-1,-3.55) D5(-3,-3.45) D6(-5,-3.55) E1(5,-2.05) E2(3,-2.15) E3(1,-2.05) E4(-1,-2.15) E5(-3,-2.05) E6(-5,-2.15) F1(5,-0.65) F2(3,-0.75) F3(1,-0.65) F4(-1,-0.75) F5(-3,-0.65) F6(-5,-0.75) G1(5,0.75) G2(3,0.65) G3(1,0.75) G4(-1,0.65) G5(-3,0.75) G6(-5,0.65) H1(5,2.15) H2(3,2.05) H3(1,2.15) H4(-1,2.05) H5(-3,2.15) H6(-5,2.05) I1(5,3.55) I2(3,3.45) I3(1,3.55) I4(-1,3.45) I5(-3,3.55) I6(-5,3.45) J1(5,4.95) J2(3,4.85) J3(1,4.95) J4(-1,4.85) J5(-3,4.95) J6(-5,4.85) K1(5,6.35) K2(3,6.25) K3(1,6.35) K4(-1,6.25) K5(-3,6.35) K6(-5,6.25) L1(5,7.75) L2(3,7.65) L3(1,7.75) L4(-1,7.65) L5(-3,7.75) L6(-5,7.65)
  silkscreen extent -5.95,-19.3 5.95,11.8, body extent -5.95,-19.3 5.95,11.8, height 14.85
TYCO_RCT-0C [mm] "0805 (2012) Surface Mount PCB Test Point"
  rect 2.95x1.4 smd: 1(0,0)
  body extent -1,-0.62 1,0.63, height 1.45

## Part data
J1 J5: library part AMPHENOL_10114633-101LF, "72 Contacts Receptacle, 6 Columns, 4 Pairs per Column", Manufacturer=AMPHENOL, Manufacturer Part Number=10114633-101LF, Author="CERN DEM MR", Component Type=Standard, ComponentHeight=14.95mm, ComponentLink1Description=Application, ComponentLink1URL=\\cern.ch\dfs\Applications\Altium\Datasheets\AMPHENOL_10114633-101LF_Application.pdf, CreateDate=30.04.2019, Family="AirMax VS", HelpURL=\\cern.ch\dfs\Applications\Altium\Datasheets\AMPHENOL_10114633-101LF.pdf, LatestRevisionDate=30.04.2019, Mounted=Yes, Part Description="72 Contacts, 2mm Pitch, 6 Columns, 4 Pairs per Column, Right Angle Receptacle", Part Number=AMPHENOL_10114633-101LF, Pin Count=72, PressFit=Yes, Sense=No, SMD=No, Socket=No, Status=None
J2 J3 J4 J6: library part AMPHENOL_10060905-101LF, "96 Contacts Receptacle, 8 Columns, 4 Pairs per Column", Manufacturer=AMPHENOL, Manufacturer Part Number=10060905-101LF, Author="CERN DEM MR", Component Type=Standard, ComponentHeight=14.95mm, ComponentLink1Description=Application, ComponentLink1URL=\\cern.ch\dfs\Applications\Altium\Datasheets\AMPHENOL_10060905-101LF_Application.pdf, CreateDate=30.04.2019, Family="AirMax VS", HelpURL=\\cern.ch\dfs\Applications\Altium\Datasheets\AMPHENOL_10060905-101LF.pdf, LatestRevisionDate=30.04.2019, Mounted=Yes, Part Description="96 Contacts, 2mm Pitch, 8 Columns, 4 Pairs per Column, Right Angle Receptacle", Part Number=AMPHENOL_10060905-101LF, Pin Count=96, PressFit=Yes, Sense=No, SMD=No, Socket=No, Status=None
J11: library part AMPHENOL_10052838-101LF, "96 Contacts Header, 8 Columns, 4 Pairs per Column", Manufacturer=AMPHENOL, Manufacturer Part Number=10052838-101LF, Author="CERN DEM MR", ClassName=Overlapping, ComponentHeight=15.35mm, ComponentLink1Description=Application, ComponentLink1URL=\\cern.ch\dfs\Applications\Altium\Datasheets\AMPHENOL_10052838-101LF_Application.pdf, Component Type=Standard, CreateDate=19/02/2018, Family="AirMax VS", HelpURL=\\cern.ch\dfs\Applications\Altium\Datasheets\AMPHENOL_10052838-101LF.pdf, LatestRevisionDate=19/02/2018, Mounted=Yes, Part Description="96 Contacts, 2mm Pitch, 8 Columns, 4 Pairs per Column, 4 Walls, Right Angle Header", Part Number=AMPHENOL_10052838-101LF, Pin Count=96, PressFit=Yes, Sense=No, SMD=No, Socket=No, Status=None
J12 J29 J33: library part AMPHENOL_10052837-101LF, "96 Contacts Header, 8 Columns, 4 Pairs per Column", Manufacturer=AMPHENOL, Manufacturer Part Number=10052837-101LF, Author="CERN DEM MR", ComponentHeight=15.35mm, ComponentLink1Description=Application, ComponentLink1URL=\\cern.ch\dfs\Applications\Altium\Datasheets\AMPHENOL_10052837-101LF_Application.pdf, Component Type=Standard, CreateDate=19/02/2018, Family="AirMax VS", HelpURL=\\cern.ch\dfs\Applications\Altium\Datasheets\AMPHENOL_10052837-101LF.pdf, LatestRevisionDate=19/02/2018, Mounted=Yes, Part Description="96 Contacts, 2mm Pitch, 8 Columns, 4 Pairs per Column, 2 Walls, Right Angle Header", Part Number=AMPHENOL_10052837-101LF, Pin Count=96, PressFit=Yes, Sense=No, SMD=No, Socket=No, Status=None
J14: library part AMPHENOL_10052825-101LF, "72 Contacts Header, 6 Columns, 4 Pairs per Column", Manufacturer=AMPHENOL, Manufacturer Part Number=10052825-101LF, Author="CERN DEM MR", ClassName=Overlapping, ComponentHeight=15.35mm, ComponentLink1Description=Application, ComponentLink1URL=\\cern.ch\dfs\Applications\Altium\Datasheets\AMPHENOL_10052825-101LF_Application.pdf, Component Type=Standard, CreateDate=19/02/2018, Family="AirMax VS", HelpURL=\\cern.ch\dfs\Applications\Altium\Datasheets\AMPHENOL_10052825-101LF.pdf, LatestRevisionDate=19/02/2018, Mounted=Yes, Part Description="72 Contacts, 2mm Pitch, 6 Columns, 4 Pairs per Column, 4 Walls, Right Angle Header", Part Number=AMPHENOL_10052825-101LF, Pin Count=72, PressFit=Yes, Sense=No, SMD=No, Socket=No, Status=None
J31: library part AMPHENOL_10052824-101LF, "72 Contacts Header, 6 Columns, 4 Pairs per Column", Manufacturer=AMPHENOL, Manufacturer Part Number=10052824-101LF, Author="CERN DEM JMW", ComponentHeight=15.35mm, ComponentLink1Description=Application, ComponentLink1URL=\\cern.ch\dfs\Applications\Altium\Datasheets\AMPHENOL_10052824-101LF_Application.pdf, Component Type=Standard, CreateDate=29/11/2017, Family="AirMax VS", HelpURL=\\cern.ch\dfs\Applications\Altium\Datasheets\AMPHENOL_10052824-101LF.pdf, LatestRevisionDate=29/11/2017, Mounted=Yes, Part Description="72 Contacts, 2mm Pitch, 6 Columns, 4 Pairs per Column, 2 Walls, Right Angle Header", Part Number=AMPHENOL_10052824-101LF, Pin Count=72, PressFit=Yes, Sense=No, SMD=No, Socket=No, Status=None
TP1 TP2 TP3 TP4 TP5 TP6: library part TYCO_RCT-0C, "Test Point", Manufacturer="TYCO ELECTRONICS", Manufacturer Part Number=RCT-0C, Author="CERN DEM JLC", Component Type=Standard, ComponentHeight=1.45mm, CreateDate=07.05.2014, HelpURL=\\cern.ch\dfs\Applications\Altium\Datasheets\TYCO_RCT-0C.pdf, LatestRevisionDate=07.05.2014, Mounted=Yes, Part Description="0805 (2012) Surface Mount Test Point", Part Number=TYCO_RCT-0C, Pin Count=1, PressFit=No, Sense=No, SMD=Yes, Socket=No, Status=None

## Via types
v1: diameter 0.4, hole 0.2, Top Layer to Bottom Layer, tented both sides, 179 vias

## Nets (pads, with @x,y where several pads share a name; then routed paths per layer and width w, separated by ;. In a path a pad name is that pad's centre, name@x,y a point inside that pad or via, vN(x,y) a via of type N, cw(c..) or ccw(c..) an arc to the next point about the centre after c; other vN are vias at no path point)
1_DIFF_15_N: J2.B5 J33.B5 | length 276.5
  Bottom Layer w0.11: J2.B5@3.4,25.5 3.16,25.5 2.82,25.84 2.82,26.049 3.146,26.375 37.636,26.375 276.969,26.375 277.119,26.225 277.119,26.031 277.119,25.84 276.779,25.5 J33.B5@276.539,25.5
1_DIFF_15_P: J2.A5 J33.A5 | length 277.3
  Bottom Layer w0.11: J2.A5@2,25.5 2.24,25.5 2.58,25.84 2.58,26.149 3.046,26.615 37.636,26.615 277.068,26.615 277.359,26.324 277.359,25.931 277.359,25.84 277.699,25.5 J33.A5@277.939,25.5
1_PE_CLK_N: J5.B5 J31.B5 | length 277.7
  Bottom Layer w0.11: J5.B5@3.6,76.5 3.36,76.5 3.02,76.84 3.02,77.292 3.269,77.541 20.847,77.541 21.196,77.192 37.642,77.192 ; 37.642,76.998 37.692,76.998 37.837,77.143 38.907,77.143 39.207,76.843 39.953,76.843 40.679,77.57 51.059,77.57 51.723,78.233 261.135,78.233 261.793,77.575 276.669,77.575 277.119,77.125 277.119,76.84 276.779,76.5 J31.B5@276.539,76.5
1_PE_CLK_P: J5.A5 J31.A5 | length 278.5
  Bottom Layer w0.11: J5.A5@2.2,76.5 2.44,76.5 2.78,76.84 2.78,77.391 3.17,77.781 20.946,77.781 21.295,77.432 37.642,77.432 37.691,77.383 39.006,77.383 39.306,77.083 39.853,77.083 40.58,77.81 50.96,77.81 51.623,78.473 261.234,78.473 261.892,77.815 276.768,77.815 277.359,77.224 277.359,76.84 277.699,76.5 J31.A5@277.939,76.5
1_SERVMOD: J5.C5 J31.C5 | length 271.8
  Bottom Layer w0.1: J5.C5@5,76.5 5.717,77.217 20.358,77.217 20.975,76.6 27.626,76.6 ; 27.626,76.685 27.648,76.707 34.22,76.707 34.452,76.475 40.539,76.475 41.074,77.01 48.94,77.01 49.35,76.6 58.425,76.6 59.14,77.315 274.324,77.315 J31.C5@275.139,76.5
2_DIFF_15_N: J2.E5 J33.E5 | length 268.7
  Top Layer w0.11: J2.E5@7.6,25.5 7.36,25.5 7.02,25.16 7.02,24.954 7.376,24.598 31.199,24.598 31.955,25.354 41.646,25.354 42.402,24.598 44.999,24.598 48.903,24.598 48.905,24.6 272.755,24.6 272.919,24.764 272.919,24.941 272.359,25.5 J33.E5@272.339,25.5
2_DIFF_15_P: J2.D5 J33.D5 | length 269.5
  Top Layer w0.11: J2.D5@6.2,25.5 6.44,25.5 6.78,25.16 6.78,24.855 7.276,24.358 31.298,24.358 32.054,25.114 41.546,25.114 42.302,24.358 44.999,24.358 49.003,24.358 49.005,24.36 272.855,24.36 273.159,24.664 273.159,24.941 273.718,25.5 J33.D5@273.739,25.5
2_PE_CLK_N: J5.E5 J31.E5 | length 269.1
  Top Layer w0.11: J5.E5@7.8,76.5 7.66,76.5 7.14,77.02 7.14,77.19 7.351,77.402 37.378,77.402 38.36,76.42 41.259,76.42 42.241,77.402 49.749,77.402 49.949,77.202 49.999,77.202 ; 49.999,77.402 51.054,77.402 51.812,78.16 59.155,78.16 59.913,77.402 272.448,77.402 272.699,77.151 272.699,77.059 272.339,76.699 J31.E5@272.339,76.5
2_PE_CLK_P: J5.D5 J31.D5 | length 270
  Top Layer w0.11: J5.D5@6.4,76.5 6.9,77 6.9,77.289 7.252,77.642 37.478,77.642 38.459,76.66 41.16,76.66 42.142,77.642 49.999,77.642 50.954,77.642 51.713,78.4 59.254,78.4 60.013,77.642 272.548,77.642 273.159,77.031 273.159,76.84 273.499,76.5 J31.D5@273.739,76.5
2_SERVMOD: J5.F5 J31.F5 | length 263.2
  L3 w0.1: J5.F5@9.2,76.5 9.88,75.82 18.42,75.82 19.405,76.805 v1(34.624,76.805) 35.687,76.805 36.49,76.002 151.98,76.002 152.078,76.1 261.284,76.1 261.564,75.82 270.259,75.82 J31.F5@270.939,76.5
3_DIFF_15_N: J2.H5 J33.H5 | length 262.2
  L3 w0.085: J2.H5@11.8,25.5 11.533,25.5 11.223,25.81 11.223,26.116 11.507,26.4 20.078,26.4 22.879,23.6 v1@39.615,23.6 ; v1(39.615,23.483) 39.622,23.483 39.739,23.6 49.35,23.6 52.15,26.4 268.555,26.4 268.716,26.239 268.716,25.81 268.406,25.5 J33.H5@268.139,25.5
3_DIFF_15_P: J2.G5 J33.G5 | length 263
  L3 w0.085: J2.G5@10.4,25.5 10.667,25.5 10.978,25.81 10.978,26.217 11.405,26.645 20.18,26.645 22.98,23.845 v1@39.615,23.845 ; v1(39.615,23.963) 39.622,23.963 39.739,23.845 49.249,23.845 52.049,26.645 268.657,26.645 268.961,26.341 268.961,25.81 269.271,25.5 J33.G5@269.539,25.5
3_PE_CLK_N: J5.H5 J31.H5 | length 260.5
  L3 w0.085: J5.H5@12,76.5 11.733,76.5 11.423,76.81 11.423,77.246 11.713,77.536 v1@39.598,77.536 ; v1(39.598,77.418) 39.683,77.418 39.801,77.536 39.876,77.536 45.354,77.536 46.178,76.712 260.389,76.712 261.213,77.536 268.505,77.536 268.716,77.325 268.716,76.986 268.23,76.5 J31.H5@268.139,76.5
3_PE_CLK_P: J5.G5 J31.G5 | length 261.3
  L3 w0.085: J5.G5@10.6,76.5 10.867,76.5 11.178,76.81 11.178,77.347 11.611,77.781 v1@39.598,77.781 ; v1(39.598,77.898) 39.683,77.898 39.801,77.781 39.977,77.781 45.455,77.781 46.28,76.957 260.287,76.957 261.112,77.781 268.607,77.781 268.961,77.427 268.961,76.986 269.447,76.5 J31.G5@269.539,76.5
3_SERVMOD: J5.I5 J31.I5 | length 254.3
  L4 w0.1: J5.I5@13.4,76.5 14.08,75.82 40.92,75.82 41.432,76.332 43.79,76.332 44.302,75.82 266.059,75.82 J31.I5@266.739,76.5
  other v1: 42.911,76.332
4_DIFF_15_N: J2.K5 J33.K5 | length 251.9
  L4 w0.085: J2.K5@16,25.5 15.733,25.5 15.423,25.81 15.423,25.881 15.905,26.364 45.117,26.364 46.06,25.421 47.5,25.421 47.557,25.363 47.765,25.363 v1(47.825,25.303) 47.91,25.303 48.028,25.421 48.152,25.421 260.759,25.421 261.702,26.364 264.334,26.364 264.469,26.229 264.469,26.03 J33.K5@263.939,25.5
4_DIFF_15_P: J2.J5 J33.J5 | length 252.8
  L4 w0.085: J2.J5@14.6,25.5 14.867,25.5 15.178,25.81 15.178,25.982 15.804,26.609 45.218,26.609 46.161,25.666 47.5,25.666 47.557,25.723 47.765,25.723 v1(47.825,25.783) 47.91,25.783 48.028,25.666 48.254,25.666 260.657,25.666 261.6,26.609 264.435,26.609 264.714,26.33 264.714,26.125 J33.J5@265.339,25.5
4_PE_CLK_N: J5.K5 J31.K5 | length 252
  L4 w0.085: J5.K5@16.2,76.5 15.933,76.5 15.623,76.81 15.623,77.322 15.75,77.45 18.054,77.45 18.559,77.955 30.059,77.955 30.325,78.221 50.069,78.221 50.893,77.397 52.775,77.397 52.892,77.279 v1(52.925,77.279) 53.01,77.279 53.128,77.397 264.443,77.397 264.508,77.331 264.508,77.069 J31.K5@263.939,76.5
4_PE_CLK_P: J5.J5 J31.J5 | length 252.8
  L4 w0.085: J5.J5@14.8,76.5 15.067,76.5 15.378,76.81 15.378,77.424 15.649,77.695 17.952,77.695 18.457,78.2 29.958,78.2 30.224,78.466 50.17,78.466 50.995,77.642 52.775,77.642 52.892,77.759 v1(52.925,77.759) 53.01,77.759 53.128,77.642 264.544,77.642 264.753,77.433 264.753,77.086 J31.J5@265.339,76.5
4_SERVMOD: J5.L5 J31.L5 | length 246.1
  Bottom Layer w0.1: J5.L5@17.6,76.5 17.7,76.6 19.141,76.6 19.617,76.124 27.553,76.124 27.626,76.051 27.699,76.124 31.752,76.124 32.018,76.39 33.81,76.39 34.076,76.124 41.244,76.124 41.95,76.83 48.129,76.83 48.702,76.257 258.686,76.257 258.929,76.5 J31.L5@262.539,76.5
5_DIFF_15_N: J2.C6 J33.C6 | length 274
  Bottom Layer w0.11: J2.C6@4.7,27.5 4.46,27.5 4.12,27.84 4.12,28.09 4.43,28.4 32.653,28.4 275.61,28.4 275.819,28.191 275.819,27.84 275.479,27.5 J33.C6@275.239,27.5
5_DIFF_15_P: J2.B6 J33.B6 | length 274.8
  Bottom Layer w0.11: J2.B6@3.3,27.5 3.54,27.5 3.88,27.84 3.88,28.189 4.331,28.64 32.653,28.64 275.709,28.64 276.059,28.291 276.059,28.191 276.059,27.931 276.059,27.84 276.399,27.5 J33.B6@276.639,27.5
5_PE_CLK_N: J5.C6 J31.C6 | length 276.2
  Bottom Layer w0.11: J5.C6@4.9,78.5 4.66,78.5 4.32,78.84 4.32,79.7 4.93,80.31 27.649,80.31 32.252,80.31 33.364,81.422 51.322,81.422 51.786,81.886 53.51,81.886 54.136,81.26 260.44,81.26 261.5,80.2 274.922,80.2 275.819,79.303 275.819,79.031 275.819,78.84 275.479,78.5 J31.C6@275.239,78.5
5_PE_CLK_P: J5.B6 J31.B6 | length 277
  Bottom Layer w0.11: J5.B6@3.5,78.5 3.74,78.5 4.08,78.84 4.08,79.799 4.831,80.55 27.649,80.55 32.152,80.55 33.265,81.662 51.223,81.662 51.687,82.126 53.609,82.126 54.235,81.5 260.539,81.5 261.599,80.44 275.021,80.44 276.059,79.403 276.059,78.931 276.059,78.84 276.399,78.5 J31.B6@276.639,78.5
5_SERVMOD: J5.A6 J31.A6 | length 279
  L4 w0.1: J5.A6@2.1,78.5 2.1,79.395 3.277,80.572 32.328,80.572 32.661,80.239 35.916,80.239 36.854,81.177 v1(52.939,81.177) 53.503,81.177 53.98,80.7 275.839,80.7 J31.A6@278.039,78.5
6_DIFF_15_N: J2.F6 J33.F6 | length 265.6
  Top Layer w0.11: J2.F6@8.9,27.5 8.66,27.5 8.32,27.16 8.32,26.705 8.41,26.615 50.002,26.615 271.461,26.615 271.619,26.772 271.619,26.966 271.084,27.5 J33.F6@271.039,27.5
6_DIFF_15_P: J2.E6 J33.E6 | length 266.4
  Top Layer w0.11: J2.E6@7.5,27.5 7.74,27.5 8.08,27.16 8.08,26.606 8.311,26.375 50.002,26.375 271.561,26.375 271.859,26.673 271.859,26.966 272.393,27.5 J33.E6@272.439,27.5
6_PE_CLK_N: J5.F6 J31.F6 | length 268.1
  Top Layer w0.11: J5.F6@9.1,78.5 8.86,78.5 8.52,78.84 8.52,79.467 9.253,80.2 26.883,80.2 28.39,81.708 37.362,81.708 37.892,81.177 43.185,81.177 44.031,80.332 44.999,80.332 46.061,80.332 46.433,80.704 49.26,80.704 49.633,80.332 271.033,80.332 271.619,79.747 271.619,78.84 271.279,78.5 J31.F6@271.039,78.5
6_PE_CLK_P: J5.E6 J31.E6 | length 268.9
  Top Layer w0.11: J5.E6@7.7,78.5 7.94,78.5 8.28,78.84 8.28,79.567 9.153,80.44 26.783,80.44 28.291,81.948 37.461,81.948 37.992,81.417 43.285,81.417 44.13,80.572 44.999,80.572 45.961,80.572 46.334,80.944 49.36,80.944 49.732,80.572 271.133,80.572 271.859,79.846 271.859,78.84 272.199,78.5 J31.E6@272.439,78.5
6_SERVMOD: J5.D6 J31.D6 | length 270.2
  Bottom Layer w0.1: J5.D6@6.3,78.5 7.6,79.8 22.489,79.8 22.836,79.453 31.722,79.453 32.323,78.852 32.693,78.852 32.77,78.775 32.82,78.775 33.906,79.861 38.699,79.861 39.538,80.7 145.507,80.7 146.332,79.875 272.464,79.875 J31.D6@273.839,78.5
7_DIFF_15_N: J2.I6 J33.I6 | length 257.2
  Top Layer w0.11: J2.I6@13.1,27.5 12.86,27.5 12.52,27.84 12.52,28.195 12.725,28.4 55.02,28.4 267.244,28.4 267.419,28.225 267.419,28.031 267.419,27.84 267.079,27.5 J33.I6@266.839,27.5
7_DIFF_15_P: J2.H6 J33.H6 | length 258
  Top Layer w0.11: J2.H6@11.7,27.5 11.94,27.5 12.28,27.84 12.28,28.294 12.626,28.64 55.02,28.64 267.343,28.64 267.659,28.324 267.659,27.931 267.659,27.84 267.999,27.5 J33.H6@268.239,27.5
7_PE_CLK_N: J5.I6 J31.I6 | length 258.3
  L3 w0.085: J5.I6@13.3,78.5 13.033,78.5 12.723,78.81 12.723,79.34 12.836,79.453 18.281,79.453 18.959,78.775 29.475,78.775 29.65,78.6 v1(29.683,78.6) ; v1@29.768,78.6 29.885,78.718 34.537,78.718 34.814,78.44 259.73,78.44 261.045,79.755 267.095,79.755 267.416,79.434 267.416,79.078 J31.I6@266.839,78.5
7_PE_CLK_P: J5.H6 J31.H6 | length 259.1
  L3 w0.085: J5.H6@11.9,78.5 12.167,78.5 12.478,78.81 12.478,79.441 12.734,79.698 18.382,79.698 19.06,79.02 29.475,79.02 v1@29.683,79.02 ; v1(29.683,79.08) v1@29.683,79.02 ; J31.H6@268.239,78.5 267.661,79.078 267.661,79.535 267.197,80 260.943,80 259.629,78.685 34.915,78.685 34.638,78.963 29.885,78.963 29.828,79.02 v1@29.683,79.02
7_SERVMOD: J5.G6 J31.G6 | length 261
  Top Layer w0.1: J5.G6@10.5,78.5 11.719,79.719 34.381,79.719 35.422,78.678 49.178,78.678 49.55,79.05 54.98,79.05 54.96,79.07 261.208,79.07 261.738,79.6 268.539,79.6 J31.G6@269.639,78.5
8_DIFF_15_N: J2.L6 J33.L6 | length 249.5
  L4 w0.085: J2.L6@17.3,27.5 17.033,27.5 16.723,27.81 16.723,27.881 17.267,28.425 40.675,28.425 41.645,27.455 42.7,27.455 42.817,27.338 v1(42.883,27.338) 42.968,27.338 43.085,27.455 44.801,27.455 45.772,28.425 263.08,28.425 263.216,28.289 263.216,28.078 J33.L6@262.639,27.5
8_DIFF_15_P: J2.K6 J33.K6 | length 250.3
  L4 w0.085: J2.K6@15.9,27.5 16.167,27.5 16.478,27.81 16.478,27.982 17.165,28.67 40.776,28.67 41.746,27.7 42.7,27.7 42.818,27.818 v1(42.883,27.818) 42.968,27.818 43.085,27.7 44.7,27.7 45.67,28.67 263.182,28.67 263.461,28.39 263.461,28.078 J33.K6@264.039,27.5